# Altium PCB PCB2.PcbDoc
Units mm, origin at the board's own origin, x right, y up, seen from the top; angles counter-clockwise.
Board outline 48.89 x 59.05 mm, 2 copper layers (Top Layer, Bottom Layer); 23 components, 32 nets, 129 pads, 0 vias.
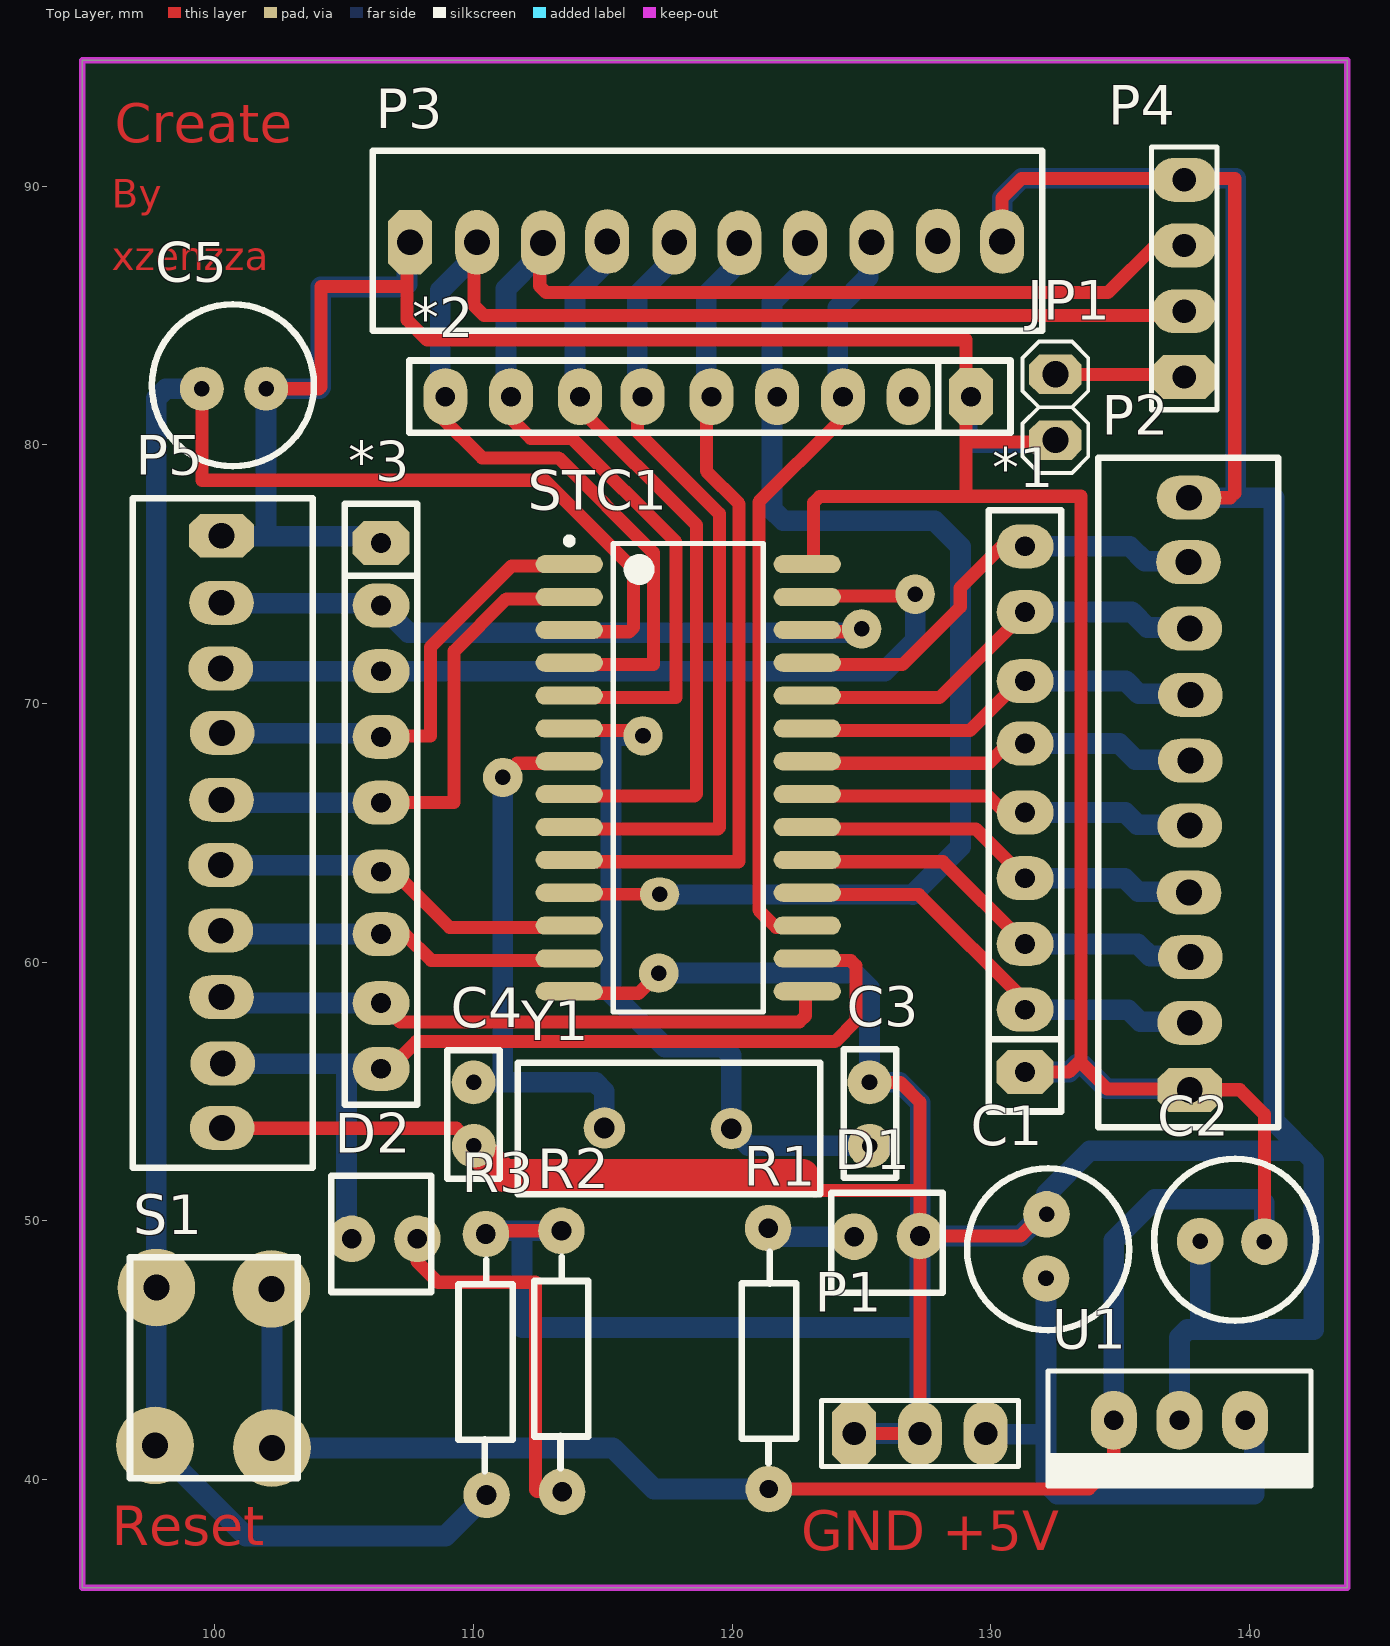
[diagram p0: Top Layer view]
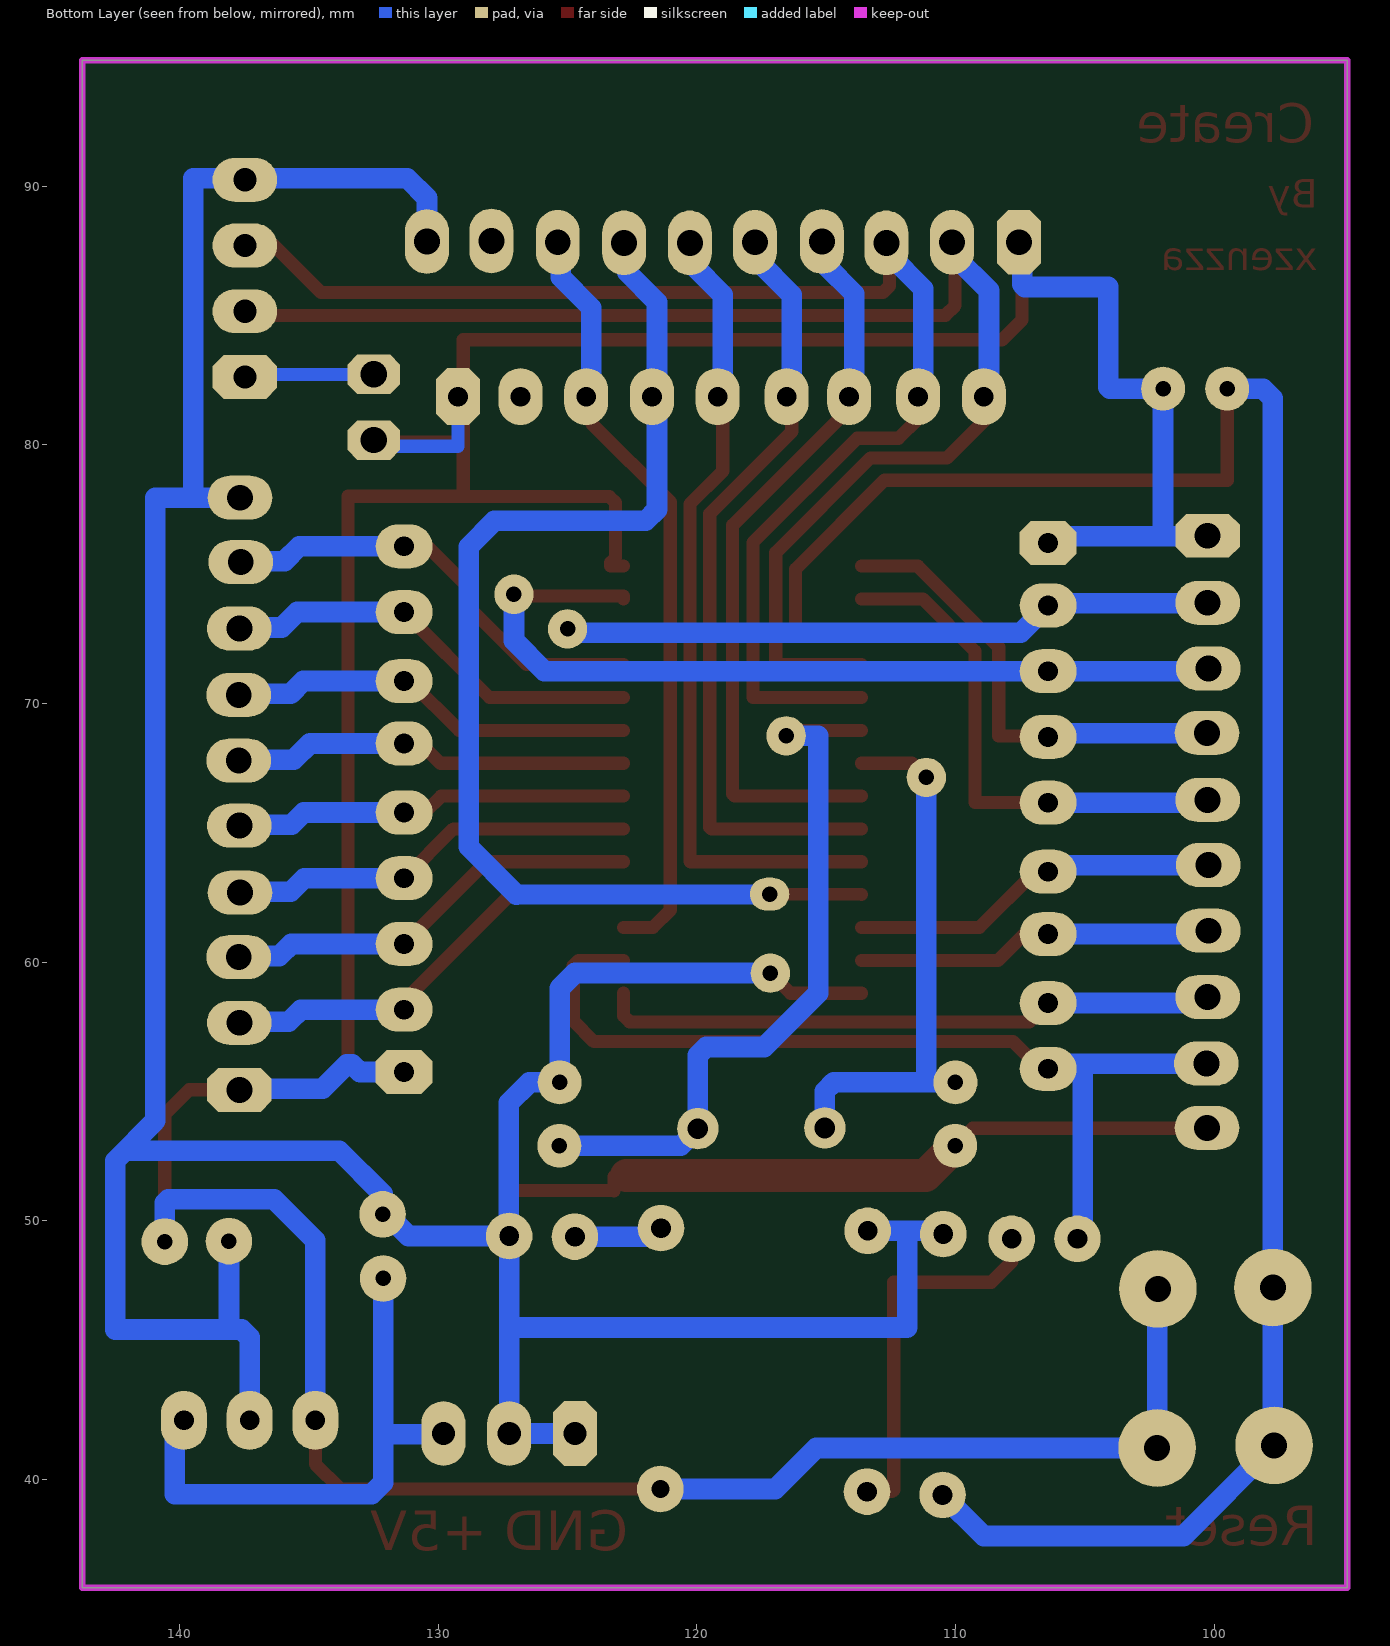
[diagram p1: Bottom Layer view, seen from below]
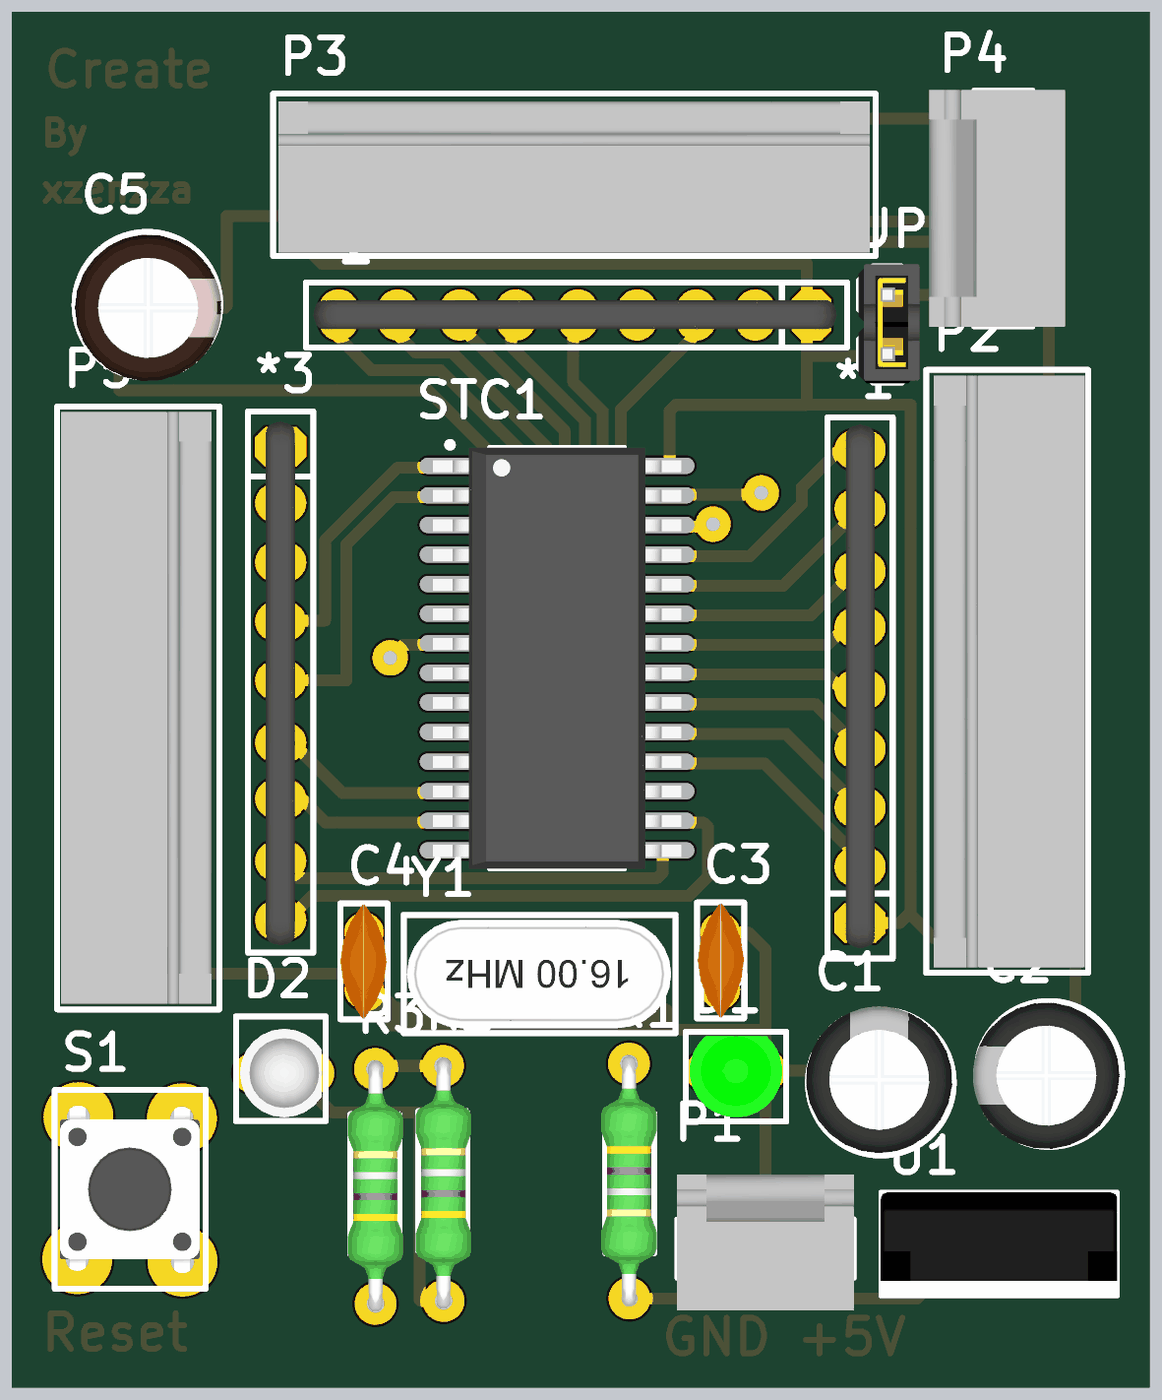
[diagram p2: 3D render of the assembled board from above, using the file's embedded part models]

## Layer stack, top to bottom
Top Solder: solder mask 0.0102, Solder Resist, Dk 3.5
Top Layer: signal copper 0.0356
Dielectric 1: dielectric 0.32, FR-4, Dk 4.8
Bottom Layer: signal copper 0.0356
Bottom Solder: solder mask 0.0102, Solder Resist, Dk 3.5

## Board outline
94.869,35.814 94.869,94.869 143.764,94.869 143.764,35.814

## Design rules (kind name [scope] priority, off if disabled: settings)
Clearance [All] p1: gap=0.254
PolygonConnect [All] p1: connectstyle=Relief reliefconductorwidth=0.254 reliefentries=4 polygonreliefangle="90 Angle" airgapwidth=0.254
RoutingVias [All] p1: holewidth=0.711 width=1.27 viastyle="Through Hole" minholewidth=0.711 minwidth=1.27 maxholewidth=0.711 maxwidth=1.27
SolderMaskExpansion [All] p1: expansion=0.102
Width [All] p1: maxlimit=1.5 minlimit=0.5 preferedwidth=1.3 toplayer_minwidth=0.508 toplayer_maxwidth=1.27 toplayer_prefwidth=0.508 minimp=50.000000 maximp=50.000000 favimp=50.000000
30 further rules are at their usual default settings.

## Components (designator, comment, footprint, x,y, rotation, side; value= is the part's Value field where it differs from the comment)
*1 "RES_Network" RES_NETWORK 131.318,65.913 r90 top
*2 "RES_Network" RES_NETWORK 119.07,81.86 r180 top
*3 "RES_Network" RES_NETWORK 106.426,66.04 r270 top
C1 "Cap Pol3" CAPA2.5EB 132.207,48.895 r270 top
C2 "Cap Pol3" CAPA2.5EB 139.446,49.276 r0 top
C3 "Cap" cap2.5mmceramic 125.31,54.13 r90 top
C4 "Cap" cap2.5mmceramic 110.01,54.13 r270 top
C5 "Cap Pol1" CAPA2.5EBR 100.711,82.296 r0 top
D1 "LED0" ledgreen 125.984,49.403 r180 top
D2 "LED0" ledred 106.56,49.31 r90 top
JP1 "JUMPER" Jumper_1X2_Black 132.49,80.18 r270 top
P1 "Header 3" HDR1X3_MTA 124.714,41.783 r0 top
P2 "Connector10" PIN10 137.67,66.51 r90 top
P3 "Connector10" PIN10 118.99,87.84 r0 top
P4 "Header 4" HDR1X4_MTA 137.47,82.62 r90 top
P5 "Connector10" PIN10 100.27,65.04 r270 top
R1 "Res1" RES-#1 121.4,44.68 r90 top
R2 "Res1" RES-#2 113.411,44.577 r270 top
R3 "Res1" RES-#2 110.49,44.45 r270 top
S1 "SW-SPST" SWITCHBUTTON 99.949,44.323 r90 top
STC1 "STC12C5608AD" SO28_M 118.3,67.13 r0 top
U1 "LT78XX" to220ab 137.287,42.291 r180 top
Y1 "XTAL" Crystal 117.51,53.58 r180 top

## Footprints (in the part's own frame and the unit in brackets; to place one, negate y for a bottom-side part, rotate by r counter-clockwise, add the part's x,y. Pads: shape width x height; smd on the part's side, far side on the other; paste and mask are expansions set on the pad)
cap2.5mmceramic [mm]
  round 1.7 hole 0.6: 1(1.225,0.005) 2(-1.225,-0.005)
  silkscreen extent -2.46,-1.02 2.51,1.01, body extent -2.43,-1.02 2.48,0.98, height 5.45
CAPA2.5EB [mm]
  round 1.8 hole 0.6: 1(1.12,-0.08) 2(-1.36,-0.06)
  silkscreen extent -3.14,-3.13 3.12,3.13, body extent -3.28,-3.22 3.02,3.08, height 2.7
CAPA2.5EBR [mm]
  round 1.7 hole 0.6: 1(1.27,-0.13) 2(-1.21,-0.13)
  silkscreen extent -3.14,-3.13 3.12,3.13, body extent -3.13,-3.27 3.17,3.01, height 2.5
Crystal [mm]
  round 1.6 hole 0.8: 1(2.454,-0.014) 2(-2.454,0.014)
  silkscreen extent -5.88,-2.53 5.8,2.55, body extent -5.68,-2.31 5.65,2.34, height 3.8
HDR1X3_MTA [mm] "Connector; Header; 3 Position"
  oct 1.7x2.5 hole 0.9: 1(0,0)
  oval 1.7x2.5 hole 0.9: 2(2.54,0) 3(5.08,0)
  silkscreen extent -1.27,-1.27 6.35,1.27, body extent -1.27,-2.66 6.35,3.18, height 2.86
HDR1X4_MTA [mm] "Connector; Header; 4 Position"
  oct 1.7x2.5 hole 0.9: 1(0,0)
  oval 1.7x2.5 hole 0.9: 2(2.54,0) 3(5.08,0) 4(7.62,0)
  silkscreen extent -1.27,-1.27 8.89,1.27, body extent -1.26,-2.66 8.9,3.18, height 10.03
Jumper_1X2_Black [mil] "Jumper, pitch 2.54mm - BLACK"
  oct 60x80 hole 40: 1(-100,0) 2(0,0)
  silkscreen extent -150,-50 50,50, body extent -152,-49 50,54, height 356
ledgreen [mm]
  round 1.8 hole 0.762: 1(1.27,0.013) 2(-1.27,-0.013)
  silkscreen extent -2.16,-1.69 2.16,2.17, body extent -1.99,-1.5 1.99,1.99, height 5.38
ledred [mm]
  round 1.8 hole 0.762: 1(0,1.27) 2(0,-1.27)
  silkscreen extent -2.06,-1.8 2.44,2.06, body extent -1.89,-1.62 1.91,1.87, height 6.5
PIN10 [mm]
  oct 1.7x2.5 hole 1: 1(-11.443,-0.013)
  oval 1.7x2.5 hole 1: 2(-8.852,-0.013) 3(-6.312,-0.038) 4(-3.823,0.013) 5(-1.232,-0.013) 6(1.283,-0.038) 7(3.823,-0.038) 8(6.388,-0.013) 9(8.954,0.038) 10(11.443,0.013)
  silkscreen extent -12.89,-3.44 12.99,3.52, body extent -12.66,-3.29 12.74,3.19, height 3.1
RES-#1 [mm]
  round 1.8 hole 0.7: 1(-5.042,-0.013)
  round 1.8 hole 0.762: 2(5.042,0.013)
  silkscreen extent -4.04,-1.07 4.13,1.03, body extent -5.39,-1.19 5.37,1.21, height 2.41
RES-#2 [mm]
  round 1.8 hole 0.762: 1(-5.042,-0.013) 2(5.042,0.013)
  silkscreen extent -4.04,-1.07 4.13,1.03, body extent -5.39,-1.19 5.37,1.21, height 2.41
RES_NETWORK [mm]
  oct 1.7x2.2 hole 0.762: 1(-10.16,0)
  oval 1.7x2.2 hole 0.762: 2(-7.747,0) 3(-5.207,0) 4(-2.667,0) 5(-0.127,0) 6(2.54,0) 7(4.953,0) 8(7.62,0) 9(10.16,0)
  silkscreen extent -11.68,-1.4 11.56,1.4, body extent -11.25,-0.64 11.25,0.61, height 5.3
SO28_M [mm] "SOIC, 28-Leads, Body 17.9x7.5mm, Pitch 1.27mm, IPC Low Density"
  oval 2.6x0.7 smd: 1(-4.6,8.255) 2(-4.6,6.985) 3(-4.6,5.715) 4(-4.6,4.445) 5(-4.6,3.175) 6(-4.6,1.905) 7(-4.6,0.635) 8(-4.6,-0.635) 9(-4.6,-1.905) 10(-4.6,-3.175) 11(-4.6,-4.445) 12(-4.6,-5.715) 13(-4.6,-6.985) 14(-4.6,-8.255) 15(4.6,-8.255) 16(4.6,-6.985) 17(4.6,-5.715) 18(4.6,-4.445) 19(4.6,-3.175) 20(4.6,-1.905) 21(4.6,-0.635) 22(4.6,0.635) 23(4.6,1.905) 24(4.6,3.175) 25(4.6,4.445) 26(4.6,5.715) 27(4.6,6.985) 28(4.6,8.255)
  silkscreen extent -4.72,-9.05 2.9,9.28, body extent -5.34,-9.04 5.33,9.04, height 2.39
SWITCHBUTTON [mm]
  round 3 hole 1: 1(-2.997,2.261) 1(3.099,2.21) 2(-3.099,-2.261) 2(3.048,-2.235)
  silkscreen extent -4.27,-3.25 4.27,3.23, body extent -3.99,-3 3.99,3, height 4.9
to220ab [mil]
  oval 70x90 hole 30: 1(-100,0) 2(0,0) 3(100,0)
  silkscreen extent -200,-75 200,100, body extent -200,-75 200,75, height 750

## Part data
C1 C2: "Polarized Capacitor (Surface Mount)"
C3 C4: "Capacitor"
C5: "Polarized Capacitor (Radial)"
D1 D2: "Typical INFRARED GaAs LED"
JP1: "Jumper"
P1: "Header, 3-Pin"
P2 P3 P5: "Header, 10-Pin"
P4: "Header, 4-Pin"
R1 R2 R3: "Resistor"
S1: "Single-Pole, Single-Throw Switch"
U1: library part 78XX
Y1: "Crystal Oscillator"

## Free pads (board coordinates)
  round 1.524 hole 0.6: 0(127.07,74.22) 2(125,72.88) 6(116.55,68.75) 7(111.13,67.14) 9(117.16,59.58)
  oval 1.524x1.27 hole 0.6: 3(117.19,62.63)

## Nets (pads, with @x,y where several pads share a name; then routed paths per layer and width w, separated by ;. In a path a pad name is that pad's centre, name@x,y a point inside that pad or via, vN(x,y) a via of type N, cw(c..) or ccw(c..) an arc to the next point about the centre after c; other vN are vias at no path point)
GND: C1.2 C2.2 C3.1 C4.1 D1.2 P1.1 P1.2 P2.10 P3.10 P4.4 P5.10 pad.9 R2.1 R3.1 STC1.14 U1.2 | length 222.8
  Top Layer w0.508: P5.10@99.708,53.581 109.339,53.581 C4.1 ; R3.1 110.604,49.619 R2.1 R2.1@113.357,49.578 ; STC1.14@113.637,58.801 116.381,58.801 pad.9 ; 123.21,51.71 123.21,51.16 123.2,51.17 127.254,51.17 ; P1.1 P1.2 D1.2 ; C3.1 126.495,55.355 127.254,54.596 127.254,51.17 ; P3.10 130.433,89.539 131.191,90.297 137.287,90.297 139.423,90.297 139.423,78.128 ; C1.2 131.975,50.255 131.136,49.416 D1.2 ; P2.10 139.248,77.953 ; D1.2 127.254,51.17
  Top Layer w1.27: C4.1 111.17,51.75 122.719,51.75
  Bottom Layer w0.8: R3.1 110.604,49.619 111.87,49.619 ; R2.1@113.52,49.497 R2.1 111.87,49.619 ; pad.9 124.71,59.58 125.305,58.985 C3.1 126.475,55.355 127.27,54.56 127.27,49.432 D1.2 ; P1.1@124.714,41.986 P1.1 P1.2 127.254,45.88 ; P3.10 130.433,89.539 131.191,90.297 137.287,90.297 139.463,90.297 139.463,78.156 ; U1.2 137.287,45.497 137.596,45.806 138.086,45.806 ; P2.10 140.94,77.953 140.94,53.866 142.48,52.326 142.48,45.806 138.086,45.806 ; C2.2 138.086,45.806 ; 142.096,52.71 133.82,52.71 132.147,51.037 C1.2 131.985,50.255 131.146,49.416 D1.2 ; 111.87,49.619 111.87,45.89 111.88,45.88 127.254,45.88 ; 127.254,45.88 D1.2
Net*1_2: *1.2 P2.2 STC1.18 | length 17.1
  Top Layer w0.508: STC1.18@122.837,62.611 127.209,62.611 131.318,58.502 *1.2
  Bottom Layer w0.8: *1.2 135.304,58.166 135.774,57.696 P2.2@137.683,57.696
Net*1_3: *1.3 P2.3 STC1.19 | length 16.8
  Top Layer w0.508: STC1.19@122.837,63.881 128.143,63.881 *1.3
  Bottom Layer w0.8: *1.3 135.674,60.706 136.144,60.236 137.734,60.236 P2.3@138.01,59.96
Net*1_4: *1.4 P2.4 STC1.20 | length 15.8
  Top Layer w0.508: STC1.20@122.837,65.151 129.413,65.151 *1.4
  Bottom Layer w0.8: *1.4 135.174,63.246 135.695,62.725 P2.4@137.657,62.725
Net*1_5: *1.5 P2.5 STC1.21 | length 15.3
  Top Layer w0.508: STC1.21@122.837,66.421 129.889,66.421 130.524,65.786 *1.5
  Bottom Layer w0.8: *1.5 135.194,65.786 135.664,65.316 P2.5@137.683,65.316
Net*1_6: *1.6 P2.6 STC1.22 | length 15.4
  Top Layer w0.508: STC1.22@122.837,67.691 129.911,67.691 130.673,68.453 *1.6
  Bottom Layer w0.8: *1.6 134.957,68.453 135.579,67.831 P2.6@137.708,67.831
Net*1_7: *1.7 P2.7 STC1.23 | length 15.9
  Top Layer w0.508: STC1.23@122.837,68.961 129.191,68.961 131.096,70.866 *1.7
  Bottom Layer w0.8: *1.7 135.214,70.866 135.709,70.371 P2.7@137.708,70.371
Net*1_8: *1.8 P2.8 STC1.24 | length 16.5
  Top Layer w0.508: STC1.24@122.837,70.231 128.016,70.231 *1.8
  Bottom Layer w0.8: *1.8 135.447,73.533 136.044,72.936 P2.8@137.683,72.936
Net*1_9: *1.9 P2.9 STC1.25 | length 17.4
  Top Layer w0.508: STC1.25@122.837,71.501 126.581,71.501 128.81,73.73 128.81,74.468 130.415,76.073 *1.9
  Bottom Layer w0.8: *1.9 135.367,76.073 135.939,75.501 P2.9@137.632,75.501
Net*2_3: *2.3 P3.8 STC1.17 | length 28.7
  Top Layer w0.508: STC1.17@122.837,61.341 121.699,61.341 121.029,62.011 121.029,77.789 124.079,80.839 *2.3@124.079,81.86
  Bottom Layer w0.8: *2.3@124.079,82.804 124.079,85.299 125.26,86.48 P3.8@125.26,87.827
Net*2_4: *2.4 P3.7 pad.3 STC1.11 | length 46.2
  Top Layer w0.508: STC1.11@113.637,62.611 pad.3
  Bottom Layer w0.8: pad.3 126.971,62.611 128.82,64.46 128.82,76.06 127.82,77.06 121.98,77.06 121.539,77.501 121.539,82.804 121.539,85.509 122.695,86.665 P3.7@122.695,87.802
Net*2_5: *2.5 P3.6 STC1.10 | length 31.5
  Top Layer w0.508: STC1.10@113.637,63.881 120.248,63.881 120.267,63.9 120.267,77.713 118.999,78.981 *2.5@118.999,81.86
  Bottom Layer w0.8: *2.5@118.999,81.86 118.999,85.789 120.155,86.945 P3.6@120.155,87.802
Net*2_6: *2.6 P3.5 STC1.9 | length 29.4
  Top Layer w0.508: STC1.9@113.637,65.151 119.441,65.151 119.505,65.215 119.505,77.335 116.332,80.508 *2.6@116.332,81.86
  Bottom Layer w0.8: *2.6@116.332,82.804 116.332,85.792 117.64,87.1 P3.5@117.64,87.827
Net*2_7: *2.7 P3.4 STC1.8 | length 27.8
  Top Layer w0.508: STC1.8@113.637,66.421 118.539,66.421 118.621,66.503 118.621,76.889 113.919,81.591 *2.7@113.919,81.86
  Bottom Layer w0.8: *2.7@113.919,82.804 113.919,85.839 115.049,86.969 P3.4@115.049,87.853
Net*2_8: *2.8 P3.3 P4.3 STC1.5 | length 52.2
  Top Layer w0.508: *2.8 111.45,81.01 112.208,80.252 113.804,80.252 117.83,76.226 117.83,70.231 STC1.5@113.637,70.231 ; P3.3@112.56,87.802 112.56,86.13 112.81,85.88 134.52,85.88 136.397,87.757 P4.3@137.287,87.757
  Bottom Layer w0.8: *2.8@111.252,82.804 111.252,86.032 112.56,87.34 P3.3@112.56,87.802
Net*2_9: *2.9 P3.2 P4.2 STC1.4 | length 54.3
  Top Layer w0.508: *2.9@108.712,81.86 108.712,81.108 110.33,79.49 113.29,79.49 116.95,75.83 116.95,71.501 STC1.4@113.637,71.501 ; P3.2@110.02,87.827 110.02,85.38 110.4,85 137.07,85 P4.2@137.287,85.217
  Bottom Layer w0.8: *2.9@108.712,82.804 108.712,85.962 110.02,87.27 P3.2@110.02,87.827
Net*3_2: *3.2 P5.2 pad.2 STC1.26 | length 27.3
  Top Layer w0.508: STC1.26@122.837,72.771 pad.2@124.891,72.771
  Bottom Layer w0.8: P5.2@100.257,73.876 106.337,73.876 *3.2 107.483,72.73 124.85,72.73 pad.2
Net*3_3: *3.3 P5.3 pad.0 STC1.27 | length 34.1
  Top Layer w0.508: STC1.27@122.837,74.041 122.837,74.15 pad.0@127.07,74.15
  Bottom Layer w0.8: P5.3@99.657,71.336 100.232,71.336 100.321,71.247 *3.3 125.887,71.247 127.07,72.43 pad.0
Net*3_4: *3.4 P5.4 STC1.1 | length 18.2
  Top Layer w0.508: *3.4 106.459,68.74 108.33,68.74 108.33,72.178 111.463,75.311 STC1.1@113.637,75.311
  Bottom Layer w0.8: P5.4@100.283,68.847 106.286,68.847 *3.4
Net*3_5: *3.5 P5.5 STC1.2 | length 20.7
  Top Layer w0.508: *3.5 109.25,66.167 109.25,72.02 111.271,74.041 STC1.2@113.637,74.041
  Bottom Layer w0.8: P5.5@99.682,66.256 100.257,66.256 100.346,66.167 *3.5
Net*3_6: *3.6 P5.6 STC1.12 | length 14.1
  Top Layer w0.508: *3.6 106.92,63.5 109.079,61.341 STC1.12@113.637,61.341
  Bottom Layer w0.8: P5.6@100.232,63.741 *3.6@106.185,63.741
Net*3_7: *3.7 P5.7 STC1.13 | length 14.4
  Top Layer w0.508: *3.7 107.343,61.087 108.359,60.071 STC1.13@113.637,60.071
  Bottom Layer w0.8: P5.7@99.657,61.201 100.232,61.201 100.346,61.087 *3.7
Net*3_8: *3.8 P5.8 STC1.15 | length 24.5
  Top Layer w0.508: *3.8 107.156,57.69 122.6,57.69 122.837,57.927 STC1.15@122.837,58.801
  Bottom Layer w0.8: P5.8@99.682,58.636 100.257,58.636 100.473,58.42 *3.8
Net*3_9: *3.9 D2.1 P5.9 STC1.16 | length 36.8
  Top Layer w0.508: *3.9 106.73,55.88 107.778,56.928 123.978,56.928 124.78,57.73 124.78,59.86 124.58,60.06 122.848,60.06 STC1.16@122.837,60.071
  Bottom Layer w0.8: P5.9@100.308,56.07 105.09,56.07 ; D2.1@105.46,48.94 105.09,49.31 105.09,56.07 ; *3.9 106.236,56.07 105.09,56.07
NetC1_1: C1.1 P1.3 U1.1 | length 21.5
  Bottom Layer w0.8: P1.3 129.817,41.76 132.127,41.76 ; C1.1 132.127,41.76 ; U1.1 140.18,41.938 140.18,39.44 132.57,39.44 132.127,39.883 132.127,41.76
NetC3_2: C3.2 pad.6 STC1.6 Y1.2 | length 28.3
  Top Layer w0.508: STC1.6@113.637,68.961 116.339,68.961 pad.6
  Bottom Layer w0.8: pad.6 115.31,68.75 115.31,58.81 117.4,56.72 119.64,56.72 119.964,56.396 Y1.2 120.625,52.905 C3.2
NetC4_2: C4.2 pad.7 STC1.7 Y1.1 | length 21.1
  Top Layer w0.508: pad.7 111.681,67.691 STC1.7@113.637,67.691
  Bottom Layer w0.8: C4.2 111.13,55.355 ; pad.7 111.13,55.355 ; Y1.1 115.056,55.014 114.715,55.355 111.13,55.355
NetC5_2: C5.2 R3.2 S1.1 STC1.3 | length 83.8
  Top Layer w0.508: C5.2 99.501,78.63 112.75,78.63 116.188,75.192 116.188,72.948 116.011,72.771 STC1.3@113.637,72.771
  Bottom Layer w0.8: C5.2 98.116,82.166 97.739,81.789 97.739,47.422 97.739,41.377 97.688,41.326 101.194,37.82 108.915,37.82 R3.2
NetD1_1: D1.1 R1.2 | length 3.7
  Bottom Layer w0.8: R1.2@121.399,50 121.399,49.751 121.76,49.39 D1.1
NetD2_2: D2.2 R2.2 | length 14.3
  Top Layer w0.508: D2.2@107.823,48.71 107.823,48.427 108.62,47.63 112.39,47.63 112.39,39.6 112.455,39.535 R2.2
NetJP1_1: JP1.1 P4.1 | length 9.6
  Top Layer w0.508: JP1.1 137.244,82.72 P4.1@137.287,82.677
  Bottom Layer w0.508: JP1.1 P4.1@137.244,82.72
VCC: *1.1 *2.1 *3.1 C2.1 C5.1 JP1.2 P2.1 P3.1 P5.1 R1.1 S1.2 STC1.28 U1.3 | length 187
  Top Layer w0.508: P5.1@99.682,76.467 P5.1@99.682,76.972 ; C5.1 104.031,82.166 104.105,82.24 104.105,86.11 107.429,86.11 ; *3.1@106.159,76.467 *3.1 ; P3.1@107.429,87.827 107.429,86.11 ; R1.1@121.425,39.916 121.701,39.64 133.788,39.64 134.747,40.599 U1.3 ; STC1.28@122.837,75.311 123.34,75.311 123.34,75.443 123.14,75.643 123.14,77.76 123.38,78 129.04,78 129.032,78.008 ; *1.1 133.003,55.753 133.482,56.232 ; JP1.2 132.41,80.1 129.032,80.1 ; C2.1 140.566,54.125 139.624,55.067 P2.1 137.645,55.105 134.485,55.105 133.482,56.108 133.482,56.232 ; 107.429,86.11 107.429,84.831 108.2,84.06 129.032,84.06 129.032,80.1 ; 129.032,78.008 133.482,78.008 133.482,56.232 ; 129.032,78.008 129.032,80.1
  Bottom Layer w0.508: *2.1 129.23,79.94 132.25,79.94 JP1.2
  Bottom Layer w0.8: P5.1@100.257,76.467 102.04,76.467 ; S1.2@102.184,47.371 102.21,47.346 102.21,41.224 115.386,41.224 116.972,39.638 R1.1 ; *3.1 106.159,76.467 102.04,76.467 ; P3.1@107.429,87.827 107.429,86.201 107.329,86.1 104.1,86.1 104.1,82.22 104.046,82.166 C5.1 101.981,76.526 102.04,76.467 ; *1.1 133.023,55.753 133.32,56.05 133.53,56.05 134.47,55.11 137.678,55.11 P2.1@137.683,55.105 ; U1.3 134.747,49.247 136.34,50.84 140.43,50.84 140.566,50.704 C2.1
pads on no net: *2.2 P3.9

## Keep-outs
Keep-Out Layer:
  the board outline again, w0.254

## Other copper
Top Layer:
  text "Create" at 96.139,91.694 h1.5
  text "By" at 96.012,89.154 h1.1
  text "xzenzza" at 96.012,86.741 h1.1
  text "Reset" at 96.012,37.465 h1.52
  text "GND +5V" at 122.66,37.27 h1.52